# Altium PCB GRBL3-10086.PcbDoc
Units mm, origin at the board's own origin, x right, y up, seen from the top; angles counter-clockwise.
Board outline 168.5 x 112.7 mm, 2 copper layers (Top Layer, Bottom Layer); 144 components, 98 nets, 484 pads, 345 vias.
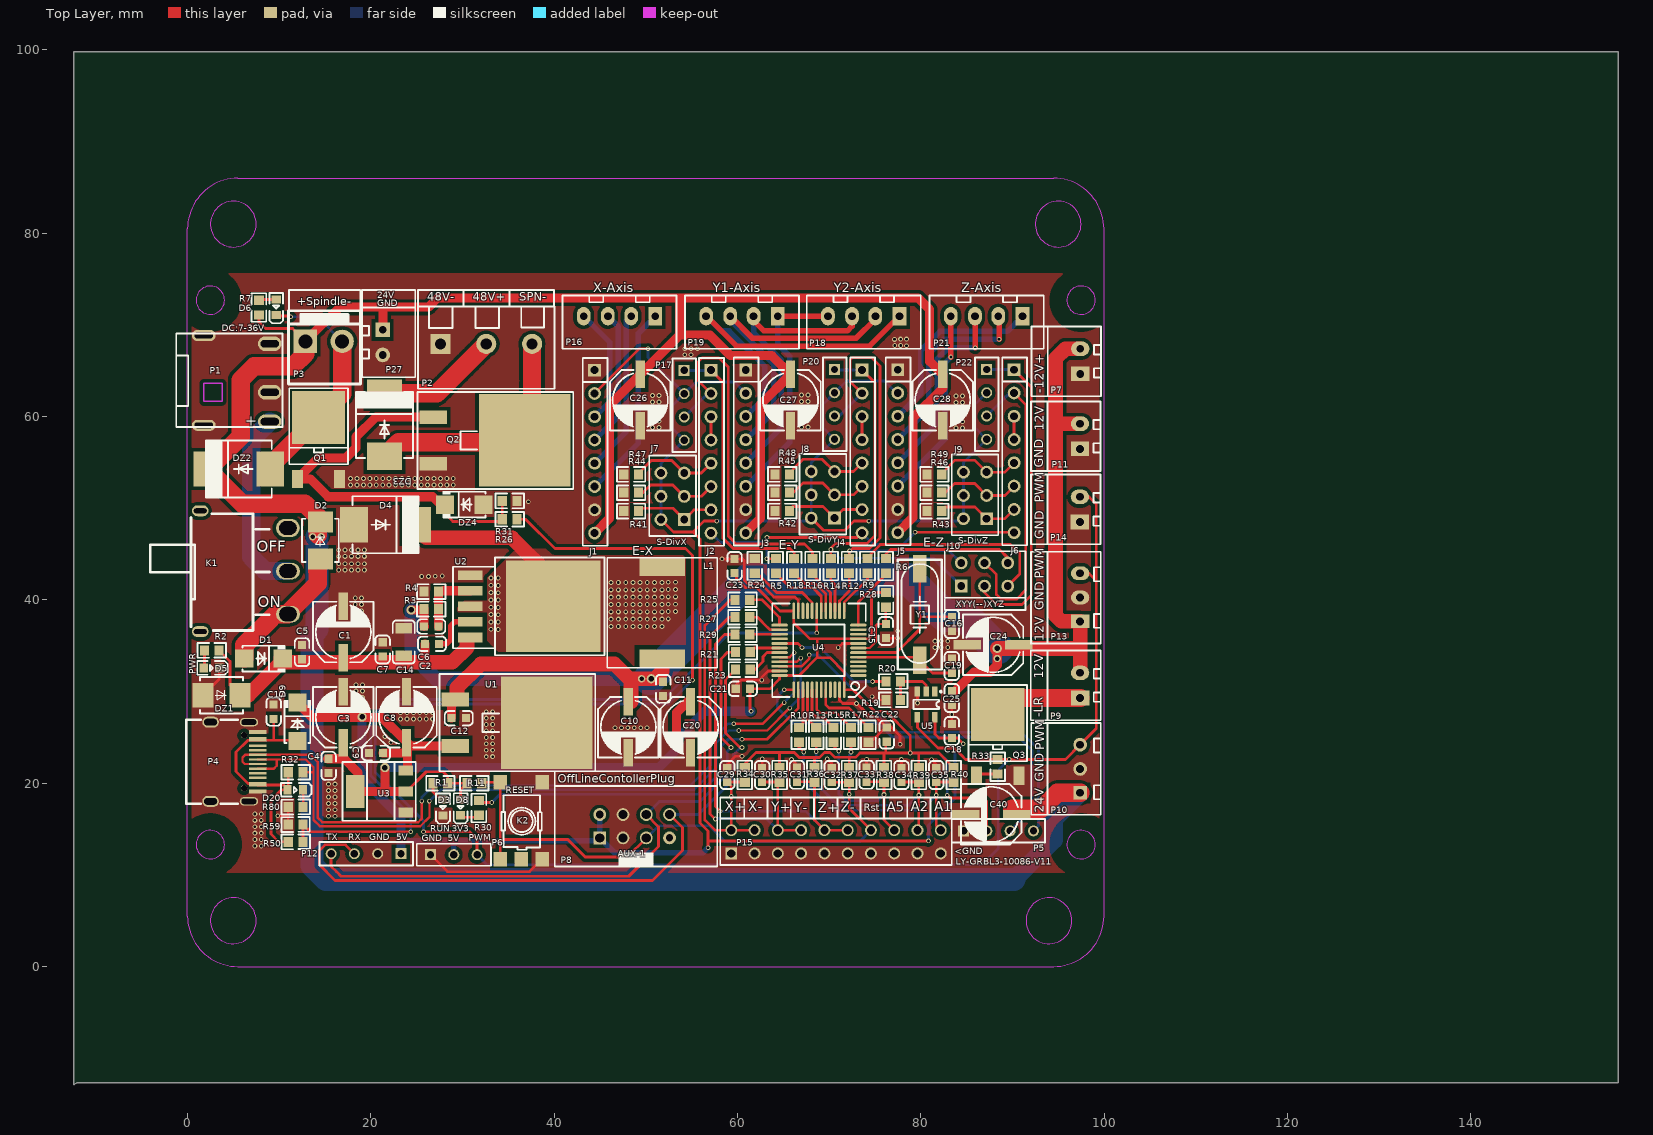
[diagram p0: Top Layer view]
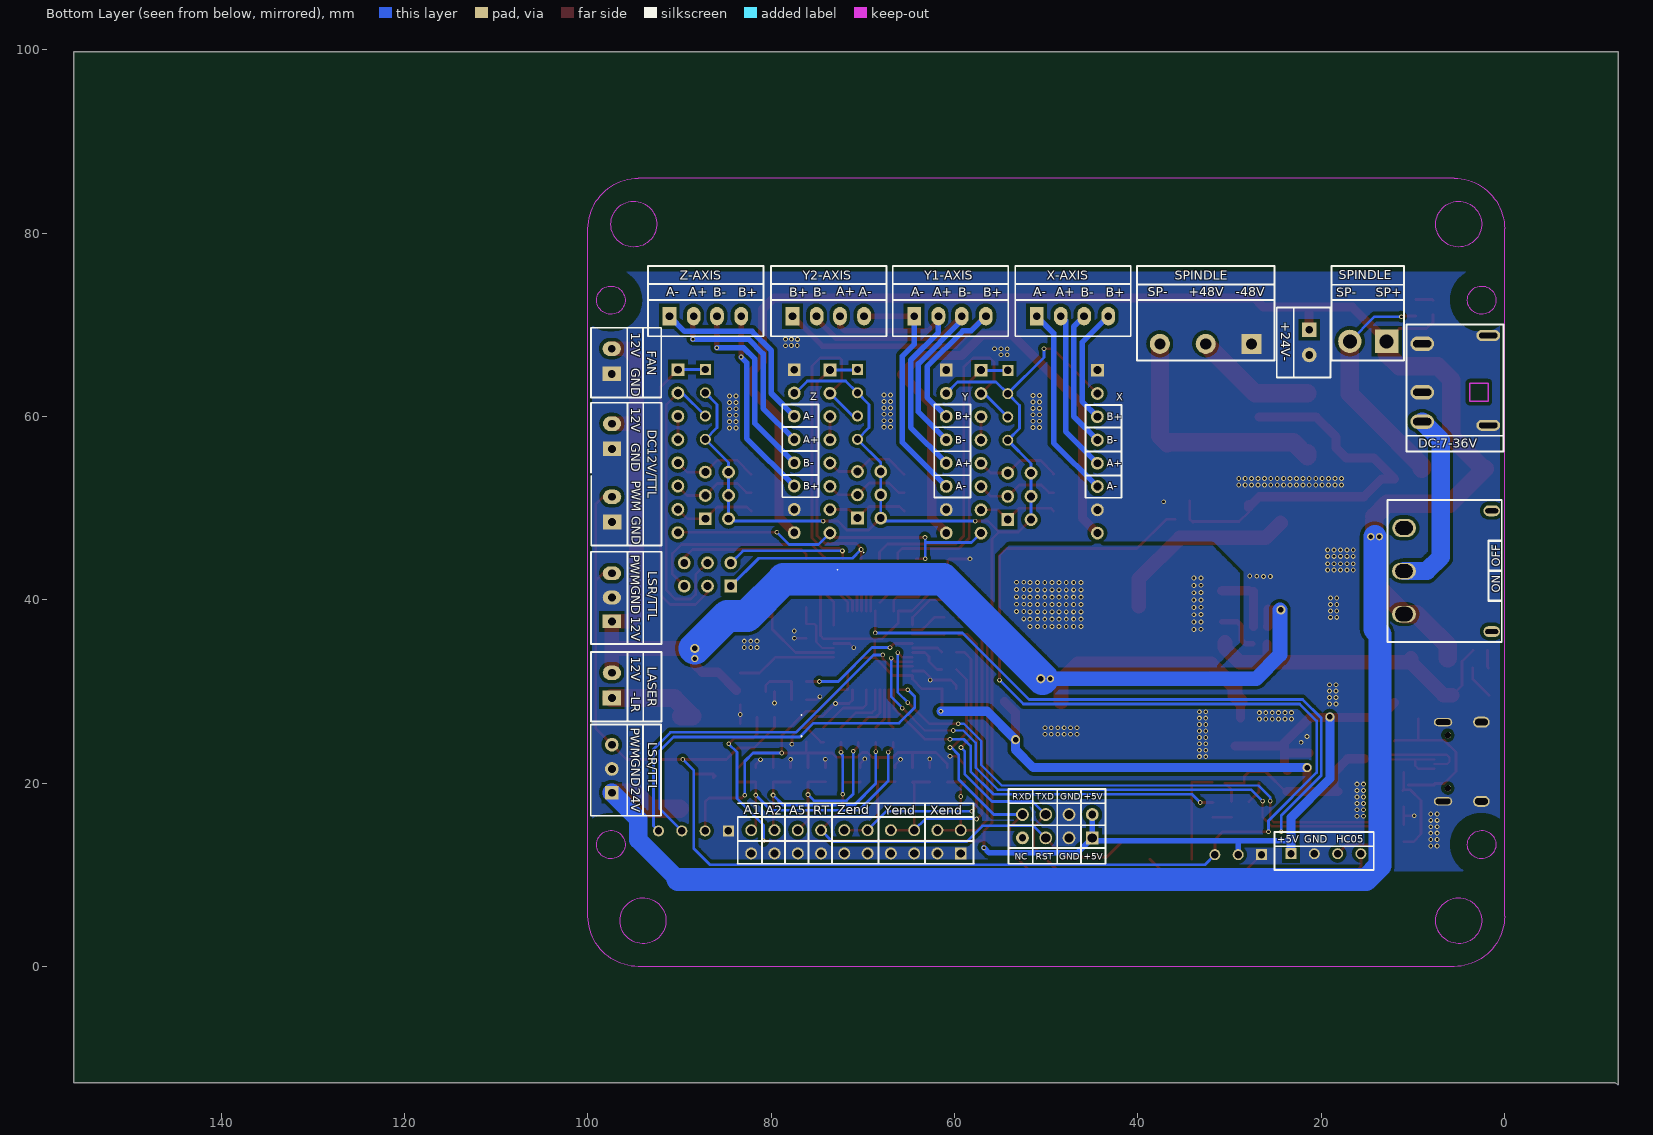
[diagram p1: Bottom Layer view, seen from below]

## Layer stack, top to bottom
Top Solder: solder mask 0.0102, Solder Resist, Dk 3.5
Top Layer: signal copper 0.0356
Dielectric1: dielectric 0.32, FR-4, Dk 4.8
Bottom Layer: signal copper 0.0356
Bottom Solder: solder mask 0.0102, Solder Resist, Dk 3.5

## Board outline
-12.4,-12.9 -12.4,99.8 156.1,99.8 156.1,-12.7 -12.1,-12.7

## Design rules (kind name [scope] priority, off if disabled: settings)
Clearance [All] p1: gap=0.178
ComponentClearance [All] p1 off: gap=0.254 collisioncheckmode=3 verticalgap=0.254 showdistances=FALSE
MinimumSolderMaskSliver [All] p1 off: minsoldermaskwidth=0.254
PolygonConnect [All] p1: connectstyle=Direct reliefconductorwidth=0.3 reliefentries=4 polygonreliefangle="90 Angle" airgapwidth=0.254
RoutingVias [All] p1: holewidth=0.6 width=0.8 viastyle="Through Hole" minholewidth=0.3 minwidth=0.3 maxholewidth=2 maxwidth=1.27
SilkToSilkClearance [All] p1 off: silktosilkclearance=0.254
SilkToSolderMaskClearance SilkscreenOverComponentPads [IsPad] p1 off: minsilkscreentomaskgap=0.254 clearancetoexposedcopper=TRUE
SolderMaskExpansion [All] p1: expansion=0.102
Width [All] p1: maxlimit=5 minlimit=0.1 preferedwidth=0.254
26 further rules are at their usual default settings.

## Components (designator, comment, footprint, x,y, rotation, side; value= is the part's Value field where it differs from the comment)
C1 "100uF/35V" 电解电容贴片6x6 17,36.5 r90 top
C2 "105" 0603C 26.675,35.2 r180 top
C3 "100uF/35V" 电解电容贴片6x6 17,27.2 r90 top
C4 "104" 0603C 15.4,21.9 r90 top
C5 "105" 0603C 12.5,34.3 r270 top
C6 "33nF" 0603C 26.6,37.1 r180 top
C7 "104" 0603C 21.3,34.6 r270 top
C8 "100uF/35V" 电解电容贴片6x6 23.9,27.2 r90 top
C9 "105" 0603C 20.575,23.3 r0 top
C10 "100uF/35V" 电解电容贴片6x6 48.1,26.1 r270 top
C11 "105" 0603C 51.9,30.3 r90 top
C12 "104" 0603C 29.6,27.1 r180 top
C14 "106" 1206C 23.6,35.4 r270 top
C15 "104" 0603C 76.2,36.6 r90 top
C16 "22pF" 0603C 83.4,37.375 r270 top
C17 "104" 0603C 9.4,27.8 r270 top
C18 "104" 0603C 83.4,25.7 r270 top
C19 "22pF" 0603C 83.4,32.8 r90 top
C20 "100uF/35V" 电解电容贴片6x6 54.9,26.1 r270 top
C21 "104" 0603C 60.6,30.3 r0 top
C22 "104" 0603C 76.3,25.3 r270 top
C23 "104" 0603C 59.695,43.7 r270 top
C24 "100uF/35V" 电解电容贴片6x6 87.9,35.1 r180 top
C25 "104" 0603C 83.4,29.3 r90 top
C26 "47uF/50V" 电解电容贴片6x6 49.4,61.8 r270 top
C27 "47uF/50V" 电解电容贴片6x6 65.8,61.8 r270 top
C28 "47uF/50V" 电解电容贴片6x6 82.4,61.8 r270 top
C29 "104" 0603C 58.9,20.9 r270 top
C30 "104" 0603C 62.7,20.9 r270 top
C31 "104" 0603C 66.5,20.925 r270 top
C32 "104" 0603C 70.3,20.9 r270 top
C33 "104" 0603C 74.1,20.925 r270 top
C34 "104" 0603C 77.9,20.9 r270 top
C35 "104" 0603C 81.7,20.9 r270 top
C40 "100uF/35V" 电解电容贴片6x6 87.7,16.6 r180 top
D1 "SS56" SMA 8.3,33.6 r180 top
D2 "SS510" SMB 14.5,46.5 r270 top
D3 "红光" 0603LED 27.9,17.3 r270 top
D4 "SS56" SMC 21.6,48.2 r180 top
D5 "红光" 0603LED 2.65,32.6 r0 top
D6 "绿光" 0603LED 9.7,71.9 r270 top
D8 "绿光" 0603LED 29.817,17.316 r270 top
D9 "SS56" SMA 12,26.7 r270 top
D20 "红光" 0603LED 11.8,19.3 r0 top
DZ1 "SMBJ36A" SMB 3.7,29.6 r180 top
DZ2 "快恢复二极管RS5M" SMC 5.6,54.3 r0 top
DZ3 "快恢复二极管RS5M" SMC 21.5,59.1 r270 top
DZ4 "稳压二极管SMAZ10V" SMA 30.2,50.4 r0 top
J1 "8P" HDR1X8 44.423,54.905 r270 top
J2 "8P" HDR1X8 57.123,54.905 r270 top
J3 "8P" HDR1X8 60.907,54.931 r270 top
J4 "8P" HDR1X8 73.607,54.931 r270 top
J5 "8P" HDR1X8 77.494,54.956 r270 top
J6 "8P" HDR1X8 90.194,54.956 r270 top
J7 "DIV-X" HDR2X3 54.2,48.76 r90 top
J8 "DIV-Y" HDR2X3 70.6,48.92 r90 top
J9 "DIV-Z" HDR2X3 87.2,48.86 r90 top
J10 "DIV-Y" HDR2X3 84.42,41.5 r0 top
K1 "5P" 拨动开关SS12D11 3.541,43.161 r0 top
K2 "开关" 按键6x6贴片5脚 34.139,11.7 r90 top
L1 "47uH/5A" 电感贴片12x12 51.8,38.6 r270 top
P1 "DC44A" DC0044A -1.224,62.65 r0 top
P2 "3P" 直插座3P-KF300 27.599,67.935 r0 top
P3 "2P" VH3.96-2P直插座 15.014,69.054 r180 top
P4 "USB座TYPE-C-16P" USB-TYPE-C-16P 4.938,22.342 r270 top
P5 "" SIP4 84.68,14.8 r0 top
P6 "3P" SIP3 26.52,12.2 r0 top
P7 "2P红色" HDR1X2_CON#1 97.407,66.029 r90 top
P8 "8P" IDC8 48.792,15.307 r0 top
P9 "2P红色" HDR1X2_CON#1 97.394,30.672 r90 top
P10 "3P" HDR1X3_CON#1 97.4,21.56 r90 top
P11 "2P红色" HDR1X2_CON#1 97.382,57.85 r90 top
P12 "" SIP4 23.29,12.305 r180 top
P13 "3P" HDR1X3_CON#2 97.394,40.259 r90 top
P14 "2P白色" HDR1X2_CON#1 97.369,49.874 r90 top
P15 "Header 10X2H" HDR2X10 59.333,12.335 r0 top
P16 "4P" HDR1X4_CON 50.949,70.958 r180 top
P17 "" SIP4 54.2,65.04 r270 top
P18 "4P" HDR1X4_CON 77.593,70.958 r180 top
P19 "4P" HDR1X4_CON 64.309,70.958 r180 top
P20 "" SIP4 70.6,65.14 r270 top
P21 "4P" HDR1X4_CON 91.005,70.958 r180 top
P22 "4P" SIP4 87.2,65.14 r270 top
P27 "2P红色" HDR1X2_CON#2 21.3,68.1 r270 top
Q1 "40N06" TO-252 14.3,55.8 r0 top
Q2 "F540NS" TO-263-2 26.8,57.4 r180 top
Q3 "UTT30N06" TO-252 88.4,23.4 r0 top
R1 "1K" 0603R 27.6,20 r180 top
R2 "10K" 0603R 2.65,34.5 r180 top
R3 "16K" 0603R 26.6,39 r180 top
R4 "1.8K" 0603R 26.6,40.9 r0 top
R5 "100" 0603R 64.195,43.7 r90 top
R6 "100" 0603R 76.195,43.7 r270 top
R7 "10K" 0603R 7.8,71.9 r90 top
R9 "100" 0603R 74.195,43.7 r270 top
R10 "100" 0603R 66.7,25.275 r270 top
R11 "10K" 0603R 31.3,20 r180 top
R12 "100" 0603R 72.195,43.7 r270 top
R13 "100" 0603R 68.6,25.275 r270 top
R14 "100" 0603R 70.195,43.7 r270 top
R15 "100" 0603R 70.5,25.275 r270 top
R16 "100" 0603R 68.195,43.7 r270 top
R17 "100" 0603R 72.4,25.275 r270 top
R18 "100" 0603R 66.195,43.7 r270 top
R19 "10K" 0603R 77,29.1 r180 top
R20 "100" 0603R 77,31.1 r180 top
R21 "100" 0603R 60.6,34.3 r0 top
R22 "10k" 0603R 74.3,25.275 r90 top
R23 "100" 0603R 60.6,32.4 r0 top
R24 "10k" 0603R 61.895,43.7 r270 top
R25 "100" 0603R 60.557,40.013 r180 top
R26 "1K" 0603R 35.15,48.8 r180 top
R27 "100" 0603R 60.557,38.113 r180 top
R28 "10k" 0603R 76.2,40 r270 top
R29 "100" 0603R 60.557,36.213 r180 top
R30 "1K" 0603R 31.8,17.3 r270 top
R31 "10K" 0603R 35.15,50.8 r0 top
R32 "10K" 0603R 11.8,21.2 r0 top
R33 "100" 0603R 88.4,21.8 r270 top
R34 "10K" 0603R 60.8,20.9 r90 top
R35 "10K" 0603R 64.6,20.9 r90 top
R36 "10K" 0603R 68.4,20.9 r90 top
R37 "10K" 0603R 72.2,20.9 r90 top
R38 "10K" 0603R 76,20.9 r90 top
R39 "10K" 0603R 79.8,20.9 r90 top
R40 "10K" 0603R 83.6,20.9 r90 top
R41 "10K" 0603R 48.4,49.7 r180 top
R42 "10K" 0603R 64.9,49.7 r180 top
R43 "10K" 0603R 81.5,49.7 r180 top
R44 "10K" 0603R 48.4,51.7 r180 top
R45 "10K" 0603R 64.9,51.7 r180 top
R46 "10K" 0603R 81.5,51.7 r180 top
R47 "10K" 0603R 48.4,53.7 r180 top
R48 "10K" 0603R 64.9,53.7 r180 top
R49 "10K" 0603R 81.5,53.7 r180 top
R50 "1K" 0603R 11.8,13.6 r0 top
R59 "1.8K" 0603R 11.8,15.5 r180 top
R80 "1K" 0603R 11.8,17.4 r0 top
U1 "CJ7805" TO-263-2 29.2,26.6 r180 top
U2 "XL4015" TO-263 35.374,39.3 r270 top
U3 "1117-3.3" SOT-223 21.1,19.1 r90 top
U4 "STM32F103C8T6/CBT6" LQFP48 68.9,34.5 r180 top
U5 "74LVC1G17" SOT-23-5 80.6,28.6 r270 top
Y1 "8M" 晶振贴片 79.9,38.4 r90 top

## Footprints (in the part's own frame and the unit in brackets; to place one, negate y for a bottom-side part, rotate by r counter-clockwise, add the part's x,y. Pads: shape width x height; smd on the part's side, far side on the other; paste and mask are expansions set on the pad)
0603C [mil]
  rect 35x35 smd: 1(-30.5,0) 2(30.5,0)
  silkscreen extent -60,-31 60,31
0603LED [mm]
  rect 0.9x1 smd: 1(-0.884,-0.017) 2(0.816,-0.017)
  silkscreen extent -1.58,-0.77 1.72,0.73
0603R [mm]
  rect 1x1.1 smd: 1(-0.8,0) 2(0.8,0)
  silkscreen extent -1.55,-0.8 1.55,0.81
1206C [mm]
  rect 1.13x1.8 smd: 1(-1.49,0) 2(1.49,0)
  silkscreen extent -2.36,-1.2 2.35,1.2, body extent -1.6,-0.81 1.6,0.79, height 1
DC0044A [mm]
  oval 2.6x1.6 hole 0.8 slot 2 at 0 deg: 1(10.2,-3.2) 2(10.2,0) 3(10.2,5.3)
  oval 2.6x1.2 hole 0.6 slot 2 at 0 deg: 4(3,6.2) 5(3,-3.6)
  Keep-Out Layer lines w0.16: 3,-1 5,-1 5,1 3,1 3,0 3,-1
  silkscreen extent 0,-3.8 11.6,6.4
HDR1X2_CON#1 [mm] "Connector; Header; 3 Position"
  rect 1.6x2 hole 0.85: 1(-1.37,0)
  oval 1.6x2 hole 0.85: 2(1.37,0)
  silkscreen extent -3.8,-2.25 3.8,3.55
HDR1X2_CON#2 [mm] "Connector; Header; 3 Position"
  rect 1.6x1.6 hole 0.86: 1(-1.37,0)
  round 1.6 hole 0.86: 2(1.37,0)
  silkscreen extent -3.8,-2.25 3.8,3.55
HDR1X3_CON#1 [mm] "Connector; Header; 3 Position"
  rect 1.5x1.5 hole 0.86: 1(-2.6,0)
  round 1.5 hole 0.86: 2(0,0) 3(2.64,0)
  silkscreen extent -5,-2.25 5,3.55
HDR1X3_CON#2 [mm] "Connector; Header; 3 Position"
  rect 1.5x2 hole 0.85: 1(-2.6,0)
  oval 1.5x2 hole 0.85: 2(0,0) 3(2.64,0)
  silkscreen extent -5,-2.25 5,3.55
HDR1X4_CON [mm] "Connector; Header; 4 Position"
  rect 1.5x2 hole 0.85: 1(-0.1,0)
  oval 1.5x2 hole 0.85: 2(2.54,0) 3(5.08,0) 4(7.72,0)
  silkscreen extent -2.41,-2.25 10.03,3.55
HDR1X8 [mm] "Connector; Header; 3 Position"
  rect 1.4x1.4 hole 0.86: 1(-10.16,0)
  round 1.4 hole 0.86: 2(-7.62,0) 3(-5.08,0) 4(-2.54,0) 5(0,0) 6(2.54,0) 7(5.08,0) 8(7.62,0)
  silkscreen extent -11.5,-1.3 9,1.4
HDR2X3 [mm] "Connector; Header; 13x2 Position"
  rect 1.4x1.4 hole 0.86: 1(0,0)
  round 1.4 hole 0.86: 2(2.54,0) 3(5.08,0) 4(5.08,2.54) 5(2.54,2.54) 6(0,2.54)
  silkscreen extent -1.8,-1.27 7,3.81
HDR2X10 [mm] "Connector; Header; 13x2 Position"
  rect 1.3x1.3 hole 0.9: 1(0,0)
  round 1.3 hole 0.9: 2(0,2.54) 3(2.54,0) 4(2.54,2.54) 5(5.08,0) 6(5.08,2.54) 7(7.62,0) 8(7.62,2.54) 9(10.16,0) 10(10.16,2.54) 11(12.7,0) 12(12.7,2.54) 13(15.24,0) 14(15.24,2.54) 15(17.78,0) 16(17.78,2.54) 17(20.32,0) 18(20.32,2.54) 19(22.86,0) 20(22.86,2.54)
  silkscreen extent -1.2,-1.27 24.06,3.81
IDC8 [mm]
  rect 1.4x1.4 hole 1: 1(-3.81,-1.27)
  round 1.4 hole 0.85: 2(-3.81,1.27)
  round 1.4 hole 1: 3(-1.27,-1.27) 4(-1.27,1.27) 5(1.27,-1.27) 6(1.27,1.27) 8(3.81,1.27)
  round 1.4 hole 0.8: 7(3.81,-1.27)
  silkscreen extent -8.72,-4.4 9.01,4.4
LQFP48 [mm] "48-Pin Thin Quad Flat Pack 0.5 mm Pitch, IPC Low Density"
  oval 1.8x0.3 smd: 1(-4.3,2.75) 2(-4.3,2.25) 3(-4.3,1.75) 4(-4.3,1.25) 5(-4.3,0.75) 6(-4.3,0.25) 7(-4.3,-0.25) 8(-4.3,-0.75) 9(-4.3,-1.25) 10(-4.3,-1.75) 11(-4.3,-2.25) 12(-4.3,-2.75) 25(4.3,-2.75) 26(4.3,-2.25) 27(4.3,-1.75) 28(4.3,-1.25) 29(4.3,-0.75) 30(4.3,-0.25) 31(4.3,0.25) 32(4.3,0.75) 33(4.3,1.25) 34(4.3,1.75) 35(4.3,2.25) 36(4.3,2.75)
  oval 0.3x1.8 smd: 13(-2.75,-4.3) 14(-2.25,-4.3) 15(-1.75,-4.3) 16(-1.25,-4.3) 17(-0.75,-4.3) 18(-0.25,-4.3) 19(0.25,-4.3) 20(0.75,-4.3) 21(1.25,-4.3) 22(1.75,-4.3) 23(2.25,-4.3) 24(2.75,-4.3) 37(2.75,4.3) 38(2.25,4.3) 39(1.75,4.3) 40(1.25,4.3) 41(0.75,4.3) 42(0.25,4.3) 43(-0.25,4.3) 44(-0.75,4.3) 45(-1.25,4.3) 46(-1.75,4.3) 47(-2.25,4.3) 48(-2.75,4.3)
  silkscreen extent -5.1,-5.1 5.1,5.1
SIP3 [mm] "Connector; Header; 4 Position"
  rect 1.2x1.2 hole 0.8: 1(0,0)
  round 1.2 hole 0.8: 2(2.54,0) 3(5.08,0)
  silkscreen extent -1.5,-1.2 6.6,1.2
SIP4 [mm] "Connector; Header; 4 Position"
  rect 1.2x1.2 hole 0.8: 1(0,0)
  round 1.2 hole 0.8: 2(2.54,0) 3(5.08,0) 4(7.62,0)
  silkscreen extent -1.3,-1.27 8.9,1.3
SMA [mm]
  rect 2x2 smd: 1(2.1,0) 2(-2.1,0)
  silkscreen extent -2.4,-1.4 2.3,1.5
SMB [mm]
  rect 2.29x2.72 smd: 1(2.025,0) 2(-2.025,0)
  silkscreen extent -2.35,-2 2.35,2
SMC [mm]
  rect 3.03x3.82 smd: 1(3.435,0) 2(-3.435,0)
  silkscreen extent -3.66,-3.11 3.6,3.11
SOT-23-5 [mm]
  rect 1.1x0.6 smd: 1(-1.4,0.95) 2(-1.4,0) 3(-1.4,-0.95) 4(1.4,-0.95) 5(1.4,0.95)
  silkscreen extent -1.5,-1.4 0.5,1.7
SOT-223 [mm] "SOT-223/SC-73; 4 Leads; Body 6.7 x 7.3 mm, inc. leads (LxW max)"
  rect 1.1x1.6 smd: 1(-2.3,-2.7) 2(0,-2.7) 3(2.3,-2.7)
  rect 3.6x2 smd: 4(0,2.8)
  silkscreen extent -3.2,-3.8 3.2,4.2
TO-252 [mm]
  rect 1.2x2 smd: 1(-2.3,-2.6) 3(2.3,-2.6)
  rect 5.8x5.8 smd: 2(0,4.1)
  silkscreen extent -3.2,-1 3.2,7.3
TO-263 [mm]
  rect 1.05x2.7 smd: 1(-3.4,-4.525) 2(-1.7,-4.525) 3(0,-4.525) 4(1.7,-4.525) 5(3.4,-4.525)
  rect 10x10.3 smd: 3(0,4.526)
  silkscreen extent -5.33,-6.4 5.33,10.11
TO-263-2 [mm]
  rect 3x1.5 smd: 1(0,-2.54) 3(0,2.54)
  rect 10x10.1 smd: 2(-10,0)
  silkscreen extent -15.3,-5.3 1.7,5.3
USB-TYPE-C-16P [mm]
  oval 0.9x2 hole 0.6 slot 1.6 at 90 deg: 1(-4.32,1.765) 2(4.32,1.765)
  oval 1.2x1.8 hole 0.7 slot 1.4 at 90 deg: 3(-4.32,-2.415) 4(4.32,-2.415)
  rect 0.26x1.9 smd: A1(-3.35,2.715) A4(-2.55,2.715) A5(-1.25,2.715) A6(-0.25,2.715) A7(0.25,2.715) A8(1.25,2.715) A9(2.55,2.715) A12(3.35,2.715) B1(3.15,2.715) B4(2.35,2.715) B5(1.75,2.715) B6(0.75,2.715) B7(-0.75,2.715) B8(-1.75,2.715) B9(-2.35,2.715) B12(-3.15,2.715)
  round 0.7 hole 0.7 unplated: ""(-2.89,1.235) ""(2.89,1.235)
  silkscreen extent -4.57,-5.08 4.57,0.57
VH3.96-2P直插座 [mil]
  rect 100x100 hole 60: 1(84.67,33.05)
  round 100 hole 60: 2(-73.33,33.05)
  silkscreen extent -152,-98 158,217
拨动开关SS12D11 [mm]
  oval 2.6x1.8 hole 1.6 slot 1.9 at 0 deg: 1(7.43,-4.715)
  oval 2.6x1.8 hole 1.5 slot 1.9 at 0 deg: 2(7.43,-0.015)
  oval 2.6x2 hole 1.5 slot 1.9 at 0 deg: 3(7.417,4.683)
  oval 1.8x1.2 hole 0.5 slot 1.4 at 0 deg: 4(-2.146,6.564) 5(-2.146,-6.619)
  silkscreen extent -7.6,-6.49 5.42,6.23
按键6x6贴片5脚 [mil]
  rect 64x58 smd: 0(0,-89) 1(0,0) 1(331,0) 2(0,-179) 2(331,-179)
  silkscreen extent 41,-178 275,-5
晶振贴片 [mm]
  rect 3x1.5 smd: 1(-5,0) 2(5,0)
  silkscreen extent -6,-2.4 6,2.4
电感贴片12x12 [mm]
  rect 2x5 smd: 1(-5,0) 2(5,0)
  silkscreen extent -6,-6 6,6
电解电容贴片6x6 [mm]
  rect 3x1 smd: 1(-2.8,0) 2(2.8,0)
  silkscreen extent -3.3,-3.3 3.3,3.3
直插座3P-KF300 [mil]
  rect 86x86 hole 48: 1(0,0)
  round 86 hole 48: 2(196.85,0) 3(393.7,0)
  silkscreen extent -97,-193 491,160

## Part data
C1 C3 C8 C10 C20 C24 C26 C27 C28 C40: library part ELECTRO1
C2 C5 C6 C7 C11 C14 C21 C22 C23: library part CAP
C4 C9 C12 C15 C16 C17 C18 C19 C25 C29 C30 C31 C32 C33 C34 C35: library part "Cap Semi", "Capacitor (Semiconductor SIM Model)"
D1 D2 D4 D9: library part 1N4148
D3 D5 D6 D8 D20: library part LED
DZ1 DZ2 DZ3 DZ4: library part 稳压二极管
J7 J8 J9 J10: library part DIP6
L1: library part Inductor, "Inductor"
P1: library part "Header 5", "Header, 5-Pin"
P5 P12 P17 P20: library part 4P
P7 P9 P11 P14 P27: library part 2P
P15: "Header, 10-Pin, Dual row, Right Angle"
Q1 Q2 Q3: library part MOSFET-N, "N-Channel MOSFET"
R1 R2 R3 R4 R5 R6 R7 R9 R10 R11 R12 R13 R14 R15 R16 R17 R18 R19 R20 R21 R22 R23 R24 R25 R26 R27 R28 R29 R30 R31 R32 R33 R34 R35 R36 R37 R38 R39 R40 R41 R42 R43 R44 R45 R46 R47 R48 R49 R50 R59 R80: library part RES, "Resistor"
U1: library part 7805
U2: library part XL4005
U3: library part LM1117
U4: library part STM32F103C6T6, "STM32 ARM-based 32-bit MCU with 32 Kbytes Flash, 48-pin LQFP, Industrial Temperature"
Y1: library part XTAL, "Crystal Oscillator"

## Free pads (board coordinates)
  round 0.8 hole 0.5: 0(13.65,46.9) 0(49.55,31.4) 1(14.6,46.9) 1(88.35,33.6)
  round 1 hole 0.6: 0(88.35,34.7) 1(21.55,21.7) 2(53.35,24.75) 3(19.05,27.225) 6(24.4,38.9) 7(50.6,31.4)

## Via types
v1: diameter 0.53, hole 0.3, Top Layer to Bottom Layer, 283 vias
v2: diameter 0.5, hole 0.3, Top Layer to Bottom Layer, 62 vias

## Nets (pads, with @x,y where several pads share a name; then routed paths per layer and width w, separated by ;. In a path a pad name is that pad's centre, name@x,y a point inside that pad or via, vN(x,y) a via of type N, cw(c..) or ccw(c..) an arc to the next point about the centre after c; other vN are vias at no path point)
3V3: C3.1 C4.2 C20.1 C21.2 C22.2 C23.2 D8.1 P5.2 pad.1@21.55,21.7 pad.2 R1.1 R11.2 R28.1 R34.2 R35.2 R36.2 R37.2 R38.2 R39.2 R40.2 U3.2 U3.4 U4.9 U4.24 U4.36 U4.48 | length 177.1
  Top Layer w0.3: U3.2@23.7,19.1 23.9,19.1 26.05,21.25 27.9,21.25 28.4,20.75 R1.1 R11.2 29.8,19.3 D8.1@29.8,18 ; C23.2@59.895,42.925 59.895,42.329 60.902,41.322 62.128,41.322 64.65,38.8 U4.24 66.15,37.5 67.9,35.75 U4.9 74.295,35.75 74.645,36.1 74.645,40.445 75,40.8 R28.1 ; R34.2 60.8,22.1 62.05,23.35 64.6,23.35 ; v1(61.5,27.85) 61.375,27.975 C21.2 63.55,30.3 64.6,31.35 U4.36 66.75,31.75 68.7,33.7 ; R35.2 64.6,23.35 ; R36.2 68.4,22.7 ; 68.7,35.7 68.7,33.7 ; R37.2 72.2,22.822 ; R38.2 76,23.3 ; C22.2@76.2,24.5 76.2,23.3 ; R39.2 79.8,23.3 ; v2(82.9,18.7) 83.2,18.4 86.8,18.4 87.22,17.98 P5.2 ; R40.2 82,23.3 79.8,23.3 ; 64.6,23.35 66.2,23.35 66.75,22.8 68.95,22.8 69.5,23.35 70.1,23.35 70.628,22.822 72.2,22.822 ; 68.7,33.7 70.1,33.7 71.65,32.15 U4.48 72.6,30.2 74.95,27.85 76.2,27.85 78.85,25.2 v2(78.85,23.3) ; 72.2,22.822 72.878,22.822 73.356,23.3 76,23.3 ; 76,23.3 76.2,23.3 ; 76.2,23.3 v2(78.85,23.3) ; v2(78.85,23.3) 79.8,23.3
  Top Layer w1: C4.2@15.3,22.675 C4.2 17.075,22.675 ; U3.4@18.2,19.1 U3.2@23.7,19.1 ; U3.4@18.6,19.1 18.6,21.149 17.1,22.649 ; 21.55,19.4 pad.1@21.55,21.7 ; pad.2 53.35,27.7 C20.1@54.55,28.9 ; 17.075,22.675 17.1,22.649 ; 17.075,22.675 17.1,22.7 17.1,22.649
  Bottom Layer w0.3: v2(78.85,23.3) 82,23.3 82.9,22.4 v2(82.9,18.7)
  Bottom Layer w1: pad.1@21.55,21.7 51.4,21.7 53.35,23.65 pad.2 56.45,27.85 v1(61.5,27.85)
12V: C6.2 C10.1 C11.2 C12.2 C24.1 C25.2 L1.2 P7.2 P9.2 P11.2 P13.1 pad.0@49.55,31.4 pad.0@88.35,34.7 pad.1@88.35,33.6 pad.6 pad.7 R3.2 U1.1 | length 173.2
  Top Layer w1: pad.6 25.7,38.9 R3.2 25.8,37.125 C6.2 ; C12.2 U1.1@28.825,28.965 ; C25.2@83.8,30.1 85.8,32.1 87.55,32.1 88.35,32.9 pad.0@88.35,34.7
  Top Layer w1.6: U1.1@28.825,28.965 29.4,29.54 29.4,30.4 32,33 46.6,33 48.2,31.4 ; C10.1@48.4,28.9 48.4,31.2 48.2,31.4 ; L1.2 51.8,32.2 51,31.4 pad.7 48.2,31.4 ; pad.0@88.35,34.7 97.344,34.7 97.394,34.75 ; P11.2 94.72,59.22 94.7,59.2 ; P9.2 97.394,34.75 ; P7.2 95.799,67.399 94.7,66.3 94.7,59.2 ; 94.7,59.2 94.7,38.3 95.341,37.659 P13.1 97.394,34.75
  Bottom Layer w1.6: pad.6@24.5,38.9 24.5,34 27.1,31.4 pad.7 50.4,31.4 51.4,31.4
  Bottom Layer w3.5: pad.7@50.4,31.4 61.25,42.25 78.65,42.25 82.65,38.25 84.8,38.25 pad.0@88.35,34.7
24V: C1.1 C2.2 C5.2 C7.2 C14.2 D1.2 DZ1.2 R2.1 U2.5 | length 36.2
  Top Layer w0.3: R2.1 4.65,33.3 4.65,30.675 DZ1.2
  Top Layer w1: 25.85,33.2 25.9,33.25 ; C2.2 25.9,33.25 ; 26.1,33.45 25.9,33.25
  Top Layer w1.6: DZ1.2 6.65,29.6 10.25,33.2 D1.2@10.6,33.2 ; D1.2@10.2,33.6 D1.2@10.6,33.2 ; 30.5,35.35 30.5,34.8 28.9,33.2 25.85,33.2 23.6,33.2 21.2,33.2 D1.2@10.6,33.2
A_LIMT: U4.28
BOOT0: R22.2 U4.44 | length 7.3
  Top Layer w0.3: U4.44 69.65,28.55 70,28.2 72.175,28.2 R22.2
BOOT1: R24.2 U4.20 | length 7.3
  Top Layer w0.3: R24.2@62.195,42.9 64.295,40.8 67.076,40.8 68.15,39.726
CPU_PWM: R19.1 R20.1 U5.2 | length 5.7
  Top Layer w0.3: R19.1 R20.1 80.2,31.1 80.6,30.7 U5.2
GND: C1.2 C3.2 C4.1 C5.1 C7.1 C8.2 C9.1 C10.2 C11.1 C12.1 C14.1 C15.1 C16.2 C17.1 C18.1 C19.2 C20.2 C21.1 C22.1 C23.1 C24.2 C25.1 C26.2 C27.2 C28.2 C29.1 C30.1 C31.1 C32.1 C33.1 C34.1 C35.1 C40.2 D3.2 D4.1 D5.2 DZ1.1 DZ4.1 J1.1 J1.7 J3.1 J3.7 J5.1 J5.7 K2.2 P1.2 P1.3 P1.4 P1.5 P2.1 P4.1 P4.2 P4.3 P4.4 P4.A1 P4.A12 P4.B1 P4.B12 P5.1 P6.1 P7.1 P8.3 P8.4 P10.2 P11.1 P12.2 P13.2 P14.1 P15.1 P15.3 P15.5 P15.7 P15.9 P15.11 P15.13 P15.15 P15.17 P15.19 P27.2 Q1.3 Q2.3 Q3.3 R4.1 R19.2 R22.1 R24.1 R31.2 R41.2 R42.2 R43.2 R44.2 R45.2 R46.2 R47.2 R48.2 R49.2 R59.2 R80.1 U1.2 U2.1 U3.1 U4.8 U4.23 U4.35 U4.47 U5.3 | length 69.3
  Top Layer w0.3: DZ1.1 3.466,31.391 D5.2 ; v2(9.85,16.45) 11,16.45 ; R59.2 11,16.45 ; R80.1 11,16.45 ; P6.1 28.37,10.35 37.336,10.35 K2.2@38.686,11.7 ; v2(58.325,44.475) C23.1 60.575,44.475 60.75,44.3 60.75,42.15 61.1,41.8 62.5,41.8 63.978,40.322 66.278,40.322 66.65,39.95 U4.23 ; C29.1 58.9,22.05 59.8,22.95 v2(60.5,22.95) ; C21.1 59.825,30.675 60.4,31.25 v2(62.65,31.25) 62.65,31.55 63.35,32.25 U4.35 ; C30.1 v2(62.7,22.65) ; v2(65.9,22.6) 66.5,22 C31.1 ; v2(69.8,22.65) 70.3,22.15 C32.1 ; v2(71,34.8) 71.45,35.25 U4.8 ; U4.47 71.15,29.05 71.504,28.696 v1(73.004,28.696) 73.85,27.85 ; 73.95,27.75 73.85,27.85 ; C33.1 v2(74.1,22.625) ; R22.1 74.575,24.475 76.175,26.075 C22.1@76.2,26.075 ; v2(74.7,29.45) 75.05,29.1 R19.2 ; C22.1@76.2,26.049 C22.1@76.2,26.075 ; C15.1 v2(77.475,35.825) ; v2(77.75,24.25) 77.75,25.15 76.825,26.075 C22.1 ; C34.1 v2(77.9,22.6) ; v2(79.65,28.75) U5.3 ; v2(81.18,22.574) 81.7,22.054 C35.1 ; C18.1 C25.1 ; 73.85,27.85 74.4,27.3 75.075,27.3 C22.1@76.2,26.175 ; C22.1@76.2,26.075 C22.1 ; C22.1@76.2,26.075 C22.1@76.2,26.175 ; C22.1@76.2,26.175 C22.1
  other v1: 7.35,13.15 8.05,13.15 7.35,13.85 8.05,13.85 7.35,14.55 8.05,14.55 7.35,15.25 8.05,15.25 7.35,15.95 8.05,15.95 15.4,16.4 16.1,16.4 7.35,16.65 8.05,16.65 15.4,17.1 16.1,17.1 15.4,17.8 16.1,17.8 15.4,18.5 16.1,18.5 15.4,19.2 16.1,19.2 15.4,19.9 16.1,19.9 32.6,22.9 33.3,22.9 32.6,23.6 33.3,23.6 32.6,24.3 33.3,24.3 32.6,25 33.3,25 46.65,25.35 47.35,25.35 48.05,25.35 48.75,25.35 49.45,25.35 50.15,25.35 32.6,25.7 33.3,25.7 46.65,26.05 47.35,26.05 48.05,26.05 48.75,26.05 49.45,26.05 50.15,26.05 32.6,26.4 33.3,26.4 23.25,27 23.95,27 24.65,27 25.35,27 26.05,27 26.75,27 32.6,27.1 33.3,27.1 23.25,27.7 23.95,27.7 24.65,27.7 25.35,27.7 26.05,27.7 26.75,27.7 32.6,27.8 33.3,27.8 18.4,28.65 19.1,28.65 18.4,29.35 19.1,29.35 18.4,30.05 19.1,30.05 18.4,30.75 19.1,30.75 81.55,34.8 82.25,34.8 82.95,34.8 81.55,35.5 82.25,35.5 82.95,35.5 77.5,36.6 18.3,38.1 19,38.1 18.3,38.8 19,38.8 18.3,39.5 19,39.5 18.3,40.2 19,40.2 25.55,42.55 26.3,42.55 27.036,42.582 27.8,42.6 16.5,43.25 17.2,43.25 17.9,43.25 18.6,43.25 19.3,43.25 16.5,43.95 17.2,43.95 17.9,43.95 18.6,43.95 19.3,43.95 16.5,44.75 17.2,44.75 17.9,44.75 18.6,44.75 19.3,44.75 16.5,45.45 17.2,45.45 17.9,45.45 18.6,45.45 19.3,45.45 17.8,52.55 18.5,52.55 19.2,52.55 19.9,52.55 20.6,52.55 21.3,52.55 22,52.55 22.7,52.55 23.4,52.55 24.1,52.55 24.8,52.55 25.5,52.55 26.2,52.55 26.9,52.55 27.6,52.55 28.3,52.55 29,52.55 17.8,53.25 18.5,53.25 19.2,53.25 19.9,53.25 20.6,53.25 21.3,53.25 22,53.25 22.7,53.25 23.4,53.25 24.1,53.25 24.8,53.25 25.5,53.25 26.2,53.25 26.9,53.25 27.6,53.25 28.3,53.25 29,53.25 83.85,58.75 84.55,58.75 50.75,58.8 51.45,58.8 67,58.85 67.7,58.85 83.85,59.45 84.55,59.45 50.75,59.5 51.45,59.5 67,59.55 67.7,59.55 83.85,60.15 84.55,60.15 50.75,60.2 51.45,60.2 67,60.25 67.7,60.25 83.85,60.85 84.55,60.85 50.75,60.9 51.45,60.9 67,60.95 67.7,60.95 83.85,61.55 84.55,61.55 50.75,61.6 51.45,61.6 67,61.65 67.7,61.65 83.85,62.25 84.55,62.25 50.75,62.3 51.45,62.3 67,62.35 67.7,62.35 54.25,66.75 54.95,66.75 54.25,67.4 54.95,67.4 55.65,67.4 78.45,67.732 77.164,67.75 77.814,67.75 77.15,68.431 77.814,68.45 78.464,68.45
  other v2: 22.2,24.45 21.55,25.1 83.4,27.5 37.2,50.7
HOLD: C35.2 P15.20 R10.2 R40.1 | length 28.3
  Top Layer w0.3: R10.2 66.7,23.95 v2(67.25,23.4) ; P15.20 81.7,15.367 v1(81.7,18.7) C35.2 83.575,20.125 R40.1
  Bottom Layer w0.3: v2(67.25,23.4) 67.25,20.25 67.625,19.875 70.45,17.05 80.05,17.05 v1(81.7,18.7)
MA_DIR: U4.11
MA_STEP: U4.10
MOTOR_EN: J2.8 J4.8 J6.8 R5.2 | length 37.9
  Top Layer w0.3: v2(63.2,44.5) R5.2 ; v2@63.45,46.8 73.097,46.8 J4.8 ; v2(79.385,47.375) 90.154,47.375 J6.8
  Bottom Layer w0.3: J2.8 58.158,46.25 63.2,46.25 ; v2(63.2,44.5) 63.2,46.25 ; v2@63.2,46.819 63.2,46.25 ; J4.8 74.868,46.05 78.059,46.05 v2(79.385,47.375)
  other v2: 63.231,46.819
MX_1A: J1.4 P16.3 | length 15
  Bottom Layer w0.6: J1.4 47,60.022 47,69.827 P16.3
MX_1B: J1.3 P16.4 | length 12.9
  Bottom Layer w0.6: P16.4 46.101,68.086 46.101,66.449 46.101,66 46.101,61.663 J1.3
MX_2A: J1.5 P16.2 | length 17.7
  Bottom Layer w0.6: J1.5 47.9,58.382 47.9,67.1 47.9,67.408 47.9,70.449 P16.2
MX_2B: J1.6 P16.1 | length 21.3
  Bottom Layer w0.6: J1.6 49.187,57.129 49.187,69.096 P16.1
MX_DIR: J2.1 P17.1 R18.1 | length 30.9
  Top Layer w0.3: J2.1 58.4,63.788 58.4,46.75 59.55,45.6 65.75,45.6 66.195,45.155 R18.1
  Bottom Layer w0.3: P17.1 57.098,65.04 J2.1
MX_DIV1: J2.5 J7.3 R47.1 | length 9.6
  Top Layer w0.3: R47.1 49.2,53.8 50.6,55.2 52.84,55.2 J7.3 56.058,53.84 J2.5
MX_DIV2: J2.6 J7.2 R44.1 | length 9.2
  Top Layer w0.3: R44.1 49.7,51.7 50.55,52.55 52.95,52.55 J7.2 56.058,51.3 J2.6
MX_DIV3: J2.7 J7.1 R41.1 | length 9
  Top Layer w0.3: R41.1 49.5,50 52.96,50 J7.1 55.265,49.825 J2.7
MX_STEP: J2.2 P17.3 R16.1 | length 41
  Top Layer w0.3: J2.2 55.7,63.948 55.7,65.955 56.15,66.405 57.995,66.405 59,65.4 59,46.957 59.857,46.1 67.3,46.1 68.195,45.205 R16.1
  Bottom Layer w0.3: P17.3 56.765,62.525 J2.2
MY_1A: J3.4 P18.2 P19.3 | length 34.7
  Top Layer w0.6: P19.3 61.637,68.55 72.95,68.55 75.053,70.653 P18.2
  Bottom Layer w0.6: P19.3 59.229,70.471 63.95,65.75 63.95,60.513 J3.4
MY_1B: J3.3 P18.1 P19.4 | length 38.8
  Top Layer w0.6: P19.4 56.642,70.958 59.9,67.7 74.436,67.7 P18.1
  Bottom Layer w0.6: P19.4 58.197,69.35 59.1,69.35 62.997,65.453 62.997,62.1 J3.3
MY_2A: J3.5 P18.3 P19.2 | length 31.9
  Top Layer w0.6: P19.2 61.769,70.481 62.9,69.35 72,69.35 72.513,69.864 P18.3
  Bottom Layer w0.6: J3.5 64.8,58.823 64.8,66.15 61.769,69.181 P19.2
MY_2B: J3.6 P18.4 P19.1 | length 26.6
  Top Layer w0.6: P19.1 P18.4
  Bottom Layer w0.6: J3.6 65.7,57.183 65.7,66.6 64.409,67.891 P19.1
MY_DIR: J4.1 J10.1 P20.1 R14.1 | length 44
  Top Layer w0.3: R14.1 v1(70.195,45.5) ; v1@70.195,45.645 70.7,46.15 74.15,46.15 75.007,47.007 75.007,63.691 J4.1
  Bottom Layer w0.3: v1@70.209,45.515 v1(70.195,45.5) 71.145,44.55 81.37,44.55 J10.1 ; P20.1 70.649,65.091 J4.1
MY_DIV1: J4.5 J8.3 R48.1 | length 9.7
  Top Layer w0.3: R48.1@65.5,53.7 67.15,55.35 69.25,55.35 J8.3 72.677,54 J4.5
MY_DIV2: J4.6 J8.2 R45.1 | length 9.5
  Top Layer w0.3: R45.1@65.5,51.7 66.1,51.7 67.15,52.75 69.31,52.75 J8.2 72.677,51.46 J4.6
MY_DIV3: J4.7 J8.1 R42.1 | length 9.2
  Top Layer w0.3: R42.1@65.5,49.7 66,50.2 69.32,50.2 J8.1 71.531,49.851 J4.7
MY_STEP: J4.2 J10.6 P20.3 R12.1 | length 48.1
  Top Layer w0.3: R12.1 72.195,45.245 72.55,45.6 74.407,45.6 75.55,46.743 75.55,65.5 74.619,66.431 72.581,66.431 72.307,66.157 72.307,63.851 J4.2
  Bottom Layer w0.3: P20.3 71.117,60.06 J4.2 ; v1(72.25,45.35) 83.11,45.35 J10.6
MZ_1A: J5.4 P21.2 | length 21.6
  Top Layer w0.6: P21.2 88.55,70.873 v2(88.55,68.45)
  Bottom Layer w0.6: J5.4 80.9,60.902 80.9,66.85 82.5,68.45 v2(88.55,68.45)
MZ_1B: J5.3 P21.1 | length 20.9
  Bottom Layer w0.6: J5.3 80.006,62.549 80.006,67.207 82.1,69.3 89.447,69.3 P21.1
MZ_2A: J5.5 P21.3 | length 21.2
  Top Layer w0.6: P21.3 85.95,70.933 v2(85.95,67.508)
  Bottom Layer w0.6: J5.5 81.8,59.262 81.8,66.3 83.008,67.508 v2(85.95,67.508)
MZ_2B: J5.6 P21.4 | length 21
  Top Layer w0.6: P21.4 83.3,70.943 v2(83.3,66.5)
  Bottom Layer w0.6: J5.6 82.7,57.622 82.7,65.9 v2(83.3,66.5)
MZ_DIR: J10.3 R9.1 | length 21.8
  Top Layer w0.3: R9.1 74.195,44.645 75.6,46.05 89.8,46.05 90.8,45.05 90.8,44.05 90.8,42.8 J10.3
MZ_DIV1: J6.5 J9.3 R49.1 | length 9.6
  Top Layer w0.3: R49.1@82.2,53.7 83.75,55.25 85.89,55.25 J9.3 89.178,53.94 J6.5
MZ_DIV2: J6.6 J9.2 R46.1 | length 9.4
  Top Layer w0.3: R46.1@82.2,51.7 82.7,51.7 83.7,52.7 85.9,52.7 J9.2 89.178,51.4 J6.6
MZ_DIV3: J6.7 J9.1 R43.1 | length 9.1
  Top Layer w0.3: R43.1@82.2,49.7 82.65,50.15 85.91,50.15 J9.1 89.178,48.86 J6.7
MZ_STEP: J10.4 R6.1 | length 14.9
  Top Layer w0.3: R6.1 76.195,44.995 76.7,45.5 88.6,45.5 89.5,44.6 J10.4
MZZ_DIR: J6.1 J10.2 P22.1 | length 35.1
  Top Layer w0.3: J10.2 86.96,40.8 88.26,39.5 91.05,39.5 92.05,40.5 92.05,63.26 J6.1
  Bottom Layer w0.3: P22.1 90.169,65.14 J6.1
MZZ_STEP: J6.2 J10.5 P22.3 | length 33.9
  Top Layer w0.3: J10.5 88.25,42.75 88.25,40.6 88.75,40.1 90.5,40.1 91.45,41.05 91.45,61.319 J6.2
  Bottom Layer w0.3: P22.3 89.716,62.576 J6.2
NetC2_1: C2.1 U2.4 | length 5.3
  Top Layer w0.6: C2.1 28.25,35.2 28.7,35.65 28.7,37.15 29.15,37.6 U2.4
NetC6_1: C6.1 R3.1 R4.2 U2.2 | length 6.8
  Top Layer w1: C6.1 27.375,40.875 R4.2 ; 27.9,41 U2.2
NetD1_1: D1.1 D2.1 K1.1 | length 15
  Top Layer w2: D1.1 6.2,35.05 8.7,37.55 9.596,38.446 K1.1 10.971,38.571 11.85,39.45 13.05,40.65 14.2,41.8 14.2,43.092 ; 14.146,43.146 14.2,43.092 ; D2.1@14.2,44.4 14.2,43.092
NetD3_1: D3.1 R1.2 | length 2.5
  Top Layer w0.3: R1.2 26.8,19.067 D3.1@27.883,17.984
NetD4_2: D4.2 L1.1 U2.3 | length 21
  Top Layer w1.6: D4.2@24.435,48.4 26.035,46.8 35.4,46.8 39.9,42.3 U2.3@39.9,39.3
  other v1: 33.114,36.8 33.9,36.782 46.214,37.1 47.014,37.1 47.814,37.1 48.614,37.1 49.364,37.1 50.164,37.1 50.964,37.1 51.764,37.1 33.9,37.582 33.114,37.6 46.214,37.9 47.014,37.9 47.814,37.9 48.614,37.9 49.364,37.9 50.164,37.9 50.964,37.9 51.764,37.9 52.45,37.932 33.114,38.4 33.9,38.382 46.214,38.7 47.014,38.7 47.814,38.7 48.614,38.7 49.364,38.7 50.164,38.7 50.964,38.7 51.764,38.7 52.45,38.732 53.25,38.732 33.9,39.182 33.114,39.2 46.214,39.5 47.014,39.5 47.814,39.5 48.614,39.5 49.364,39.5 50.164,39.5 50.964,39.5 51.764,39.5 52.45,39.532 53.25,39.532 33.114,40 33.9,39.982 46.214,40.3 47.014,40.3 47.814,40.3 48.614,40.3 49.364,40.3 50.164,40.3 50.964,40.3 51.764,40.3 52.45,40.332 53.25,40.332 33.9,40.782 33.114,40.8 46.214,41.1 47.014,41.1 47.814,41.1 48.614,41.1 49.364,41.1 50.164,41.1 50.964,41.1 51.764,41.1 52.45,41.132 53.25,41.132 33.114,41.6 33.9,41.582 46.214,41.9 47.014,41.9 47.814,41.9 48.614,41.9 49.364,41.9 50.164,41.9 50.964,41.9 51.764,41.9 52.45,41.932 53.25,41.932 33.9,42.382 33.114,42.4
NetD5_1: D5.1 R2.2 | length 2
  Top Layer w0.3: D5.1 1.85,32.667 R2.2
NetD6_1: D6.1 R7.2 | length 1.9
  Top Layer w0.3: R7.2 7.884,72.784 D6.1
NetD6_2: D6.2 DZ2.1 P3.2 Q1.2 | length 25.5
  Top Layer w0.3: D6.2@9.683,70.984 11.166,70.984 v2(11.25,70.9)
  Top Layer w1: 16.876,65.6 16.892,65.584
  Top Layer w2: DZ2.1 9.035,54.635 Q1.2 16.876,62.476 16.876,65.6 P3.2
  Bottom Layer w0.3: v2(11.25,70.9) 14.191,70.9 P3.2
NetD8_2: D8.2 R30.2 | length 2
  Top Layer w0.3: D8.2@29.8,16.3 R30.2@31.8,16.3
NetD20_2: D20.2 R80.2 | length 1.9
  Top Layer w0.254: R80.2 12.616,17.416 D20.2
NetDZ4_2: DZ4.2 Q1.1 Q2.1 R26.2 R31.1 | length 45.3
  Top Layer w0.3: DZ4.2@27.9,49.6 28.95,48.55 34.1,48.55 R26.2 ; R26.2@34,48.45 R26.2 ; R31.1 R26.2
  Top Layer w1: Q2.1 20.54,59.94 18.39,57.79 18.39,56.59 17.3,55.5 14.3,55.5 Q1.1 13.4,53.2 15.35,51.25 26.75,51.25 27.9,50.1 DZ4.2@27.9,50.4
NetJ2_3: J2.3 J2.4 | length 2.5
  Top Layer w0.3: J2.4 J2.3
NetJ4_3: J4.3 J4.4 | length 2.5
  Top Layer w0.3: J4.4 J4.3
NetJ6_3: J6.3 J6.4 | length 2.5
  Top Layer w0.3: J6.4 J6.3
NetK1_2: K1.2 P1.1 | length 20.3
  Bottom Layer w2: P1.1 6.95,57.424 6.95,44.7 8.504,43.146 K1.2
NetP9_1: P9.1 Q3.2 | length 10.9
  Top Layer w2: Q3.2@89.85,27.3 88.6,27.3 90.602,29.302 P9.1
NetQ3_1: Q3.1 R33.2 | length 2.6
  Top Layer w0.3: Q3.1 86.3,21 R33.2 ; Q3.1@86.3,20.6 Q3.1@86.3,20.8
NetR5_1: R5.1 U4.18 | length 7.6
  Top Layer w0.3: R5.1 65.773,41.322 68.228,41.322 69.15,40.4 U4.18
NetR6_2: R6.2 U4.12 | length 6.9
  Top Layer w0.3: U4.12 73.2,39.8 76.195,42.795 R6.2
NetR9_2: R9.2 U4.13 | length 5.2
  Top Layer w0.3: U4.13 71.65,39.7 74.195,42.245 R9.2
NetR10_1: R10.1 U4.39 | length 4.3
  Top Layer w0.3: R10.1 67.15,26.525 U4.39
NetR12_2: R12.2 U4.14 | length 4.5
  Top Layer w0.3: U4.14 71.15,39.9 72.195,40.945 R12.2
NetR13_1: R13.1 U4.40 | length 4.5
  Top Layer w0.3: U4.40 67.65,27.025 R13.1
NetR14_2: R14.2 U4.15 | length 4.3
  Top Layer w0.3: R14.2 70.195,42.155 70.65,41.7 U4.15
NetR15_1: R15.1 U4.41 | length 5.6
  Top Layer w0.3: U4.41 68.15,27.65 68.6,27.2 69.375,27.2 R15.1
NetR16_2: R16.2 U4.16 | length 4.9
  Top Layer w0.3: R16.2 68.195,42.755 70.15,40.8 U4.16
NetR17_1: R17.1 U4.42 | length 6.7
  Top Layer w0.3: U4.42 68.65,28.05 69,27.7 70.775,27.7 R17.1
NetR18_2: R18.2 U4.17 | length 6.2
  Top Layer w0.3: R18.2 67.295,41.8 68.474,41.8 69.65,40.624 U4.17
NetR20_2: R20.2 U4.29 | length 13.3
  Top Layer w0.3: U4.29 66.6,35.25 v2(67.05,34.8) ; v2(74.75,31.1) R20.2
  Bottom Layer w0.3: v2(67.05,34.8) 69,34.8 72.7,31.1 v2(74.75,31.1)
NetR21_2: R21.2 U4.30 | length 3.4
  Top Layer w0.3: R21.2 61.85,34.75 U4.30
NetR23_2: R23.2 U4.31 | length 4.3
  Top Layer w0.3: R23.2 61.9,32.4 62.8,33.3 62.8,33.8 63.25,34.25 U4.31
NetR25_1: R25.1 U4.25 | length 5.1
  Top Layer w0.3: R25.1@61.157,40.013 62.687,40.013 64.6,38.1 U4.25
NetR27_1: R27.1 U4.26 | length 4
  Top Layer w0.3: R27.1@61.157,38.113 62.187,38.113 63.35,36.95 63.528,36.772 63.55,36.75 U4.26
NetR29_1: R29.1 U4.27 | length 3.5
  Top Layer w0.3: R29.1@61.157,36.213 61.195,36.25 U4.27
NetR30_1: R30.1 U4.38 | length 42.7
  Top Layer w0.3: R30.1@31.8,17.9 v2(33.2,17.9) ; v2(60.5,24.8) 63.25,24.8 66.65,28.2 U4.38
  Bottom Layer w0.3: v2(33.2,17.9) 34.1,18.8 35.6,18.8 55.75,18.8 58.25,21.3 58.25,24.05 59,24.8 v2(60.5,24.8)
NRST: C15.2 R28.2 U4.7 | length 7
  Top Layer w0.254: U4.7 74.45,34.75 75.1,35.4 75.1,37.2 75.275,37.375 C15.2 R28.2
PROBE: C33.2 P15.16 R15.2 R38.1 | length 19
  Top Layer w0.3: R15.2 70.5,24.05 v2(71.05,23.5) ; C33.2 75.949,20.151 R38.1 v1(76,18.75) 76,15.987 P15.16
  Bottom Layer w0.3: v2(71.05,23.5) 71.05,19.25 71.05,18.85 71.8,18.1 75.35,18.1 v1(76,18.75)
RESET: C32.2 K2.1 P8.5 P15.14 R11.1 R17.2 R37.1 | length 68.4
  Top Layer w0.3: R11.1@31.9,20.1 31.907,20.107 34.139,20.107 34.139,13.8 ; K2.1@34.139,11.7 34.139,13.8 ; P8.5 47.975,11.95 43.4,11.95 41.488,13.862 34.201,13.862 34.139,13.8 ; C32.2 70.325,20.1 R37.1 v1(72.2,18.8) 72.2,17.247 P15.14 ; v2(72.4,23.4) R17.2
  Bottom Layer w0.3: P8.5 51.375,15.35 56.95,15.35 58.65,13.65 73.348,13.65 P15.14 ; v1(72.2,18.8) 72.2,23 72.4,23.2 v2(72.4,23.4)
RUN: C34.2 P15.18 R13.2 R39.1 | length 24.4
  Top Layer w0.3: v2(68.6,23.45) R13.2 ; C34.2 79.775,20.125 R39.1 v1(79.8,18.7) 79.8,15.022 P15.18
  Bottom Layer w0.3: v2(68.6,23.45) 68.6,19.95 70.95,17.6 78.7,17.6 v1(79.8,18.7)
RXD: P8.8 P12.3 R23.1 | length 74.4
  Top Layer w0.3: P12.3@18.21,12.45 18.075,12.45 17.25,13.275 15,13.275 14.39,12.664 14.39,11.1 16.118,9.372 50.722,9.372 54,12.65 54,15.178 P8.8 ; R23.1 58.7,31.3 58.7,30.3 58.7,25.5 60.3,23.9 v2(60.5,23.9)
  Bottom Layer w0.3: P8.8 55.727,16.577 59.55,20.4 59.55,23.1 v2@60.35,23.9
SPINDLE_PWM: P6.3 P10.3 P13.3 P14.2 R26.1 R33.1 U5.4 | length 214
  Top Layer w0.3: v2(25.75,14.7) 30.75,14.7 31.6,13.85 P6.3 P6.3@31.6,12 ; R26.1 36.9,48.8 40.1,45.6 43.8,45.6 ; 43.4,45.6 43.8,45.6 ; v2(55.1,31.25) 55.1,44.85 54.35,45.6 43.8,45.6 ; U5.4 79.65,26.1 81.9,23.85 83.65,23.85 84.5,23 84.9,22.6 R33.1 95.8,22.6 P10.3 99.15,25.95 99.15,42.1 ; P14.2 98.356,51.244 99.15,50.45 99.15,42.1 ; P13.3 98.351,42.899 99.15,42.1
  Bottom Layer w0.3: v2(25.75,14.7) 25.75,15.9 20.5,21.15 20.5,26.8 22.35,28.65 52.5,28.65 v2(55.1,31.25) ; P6.3 32.7,11.1 86.7,11.1 88.45,12.85 88.45,21.4 v2(89.65,22.6)
SPN+: DZ3.2 P2.2 | length 13.3
  Top Layer w2: DZ3.2 27.199,62.535 P2.2
SPN-: DZ3.1 P2.3 Q2.2 | length 27.2
  Top Layer w2: DZ3.1@21.5,55.995 DZ3.1 23.035,57.2 36.7,57.2 36.8,57.1 37.599,57.899 37.599,63.8 ; 37.599,64.1 P2.3
SWCLK: P5.3 U4.37 | length 42.8
  Top Layer w0.3: v2(65.1,30.2) U4.37
  Bottom Layer w0.3: v2(65.1,30.2) 64.35,29.45 64.35,28.25 66.05,26.55 75.4,26.55 76.9,25.05 90.65,25.05 92.15,23.55 92.15,17.19 P5.3
SWDIO: P5.4 U4.34 | length 42.4
  Top Layer w0.3: U4.34 67,32.75 67.85,33.6 v2(67.85,34)
  Bottom Layer w0.3: v2(67.85,34) 68.85,34 77.3,25.55 91,25.55 92.84,23.71 92.84,15.34 P5.4
TXD: P8.6 P12.4 R21.1 | length 68.7
  Top Layer w0.3: P12.4 15.67,10.935 16.252,10.352 16.755,9.85 48.15,9.85 51.4,13.1 51.4,15.238 P8.6 ; v2(59.3,23.9) 58.2,25 58.2,31.1 58.2,33.55 58.95,34.3 R21.1
  Bottom Layer w0.3: P8.6 51.485,18 55.9,18 58.9,21 58.9,23.5 v2(59.3,23.9)
USB-CHK: R50.2 R59.1 U4.19 | length 83.3
  Top Layer w0.3: R50.2 12.6,14.4 ; 12.6,14.6 12.6,14.4 ; v2(24.35,14.7) 13.4,14.7 R59.1 12.6,14.4 ; v2(68.65,36.4) U4.19
  Bottom Layer w0.3: v2(24.35,14.7) 24.35,16.5 20,20.85 20,27.1 22.028,29.128 51.878,29.128 54.25,31.5 54.4,31.65 59.15,36.4 v2(68.65,36.4)
USB_DM: P4.A7 P4.B7 U4.32 | length 84.1
  Top Layer w0.254: P4.A7 6.258,22.092 6,22.35 6,22.8 6.292,23.092 P4.B7 13.458,23.092 14.2,22.35 14.2,16.25 14.718,15.732 25.182,15.732 25.55,16.1 v2(25.55,18.05) ; v2(59.6,26.5) 62.8,26.5 v2(65.1,28.8) ; U4.32 65.7,33.75 v2(66.2,34.25)
  Bottom Layer w0.254: v2(25.55,18.05) 25.55,18.45 26.85,19.75 54.85,19.75 57.1,22 57.1,24.6 59,26.5 v2(59.6,26.5) ; v2(65.1,28.8) 66.2,29.9 v2(66.2,34.25)
USB_DP: P4.A6 P4.B6 R32.2 U4.33 | length 84.9
  Top Layer w0.254: P4.B6 9.442,21.592 9.75,21.9 9.75,22.592 ; P4.A6 9.75,22.592 ; R32.2 13.7,21.2 13.75,21.25 ; v2(26.4,18.05) 26.4,16.3 25.4,15.3 14.45,15.3 13.75,16 13.75,21.25 ; v2(60.15,25.75) 63.25,25.75 v2(65.7,28.2) ; U4.33 66.5,33.25 v2(66.9,33.65) ; 9.75,22.592 12.908,22.592 13.75,21.75 13.75,21.25
  Bottom Layer w0.254: v2(26.4,18.05) 27.65,19.3 55.3,19.3 57.7,21.7 57.7,24.4 59.05,25.75 v2(60.15,25.75) ; v2(65.7,28.2) 66.9,29.4 v2(66.9,33.65)
VCC: C8.1 C9.2 C18.2 D9.2 J1.2 J3.2 J5.2 J7.4 J7.5 J7.6 J8.4 J8.5 J8.6 J9.4 J9.5 J9.6 P6.2 P8.1 P8.2 P12.1 P17.2 P17.4 P20.2 P20.4 P22.2 P22.4 pad.3 U1.3 U3.3 U5.5 | length 270
  Top Layer w0.3: J1.2 49.305,67.408 v2(50.25,67.408) ; J7.6 53.02,47.4 55.17,47.4 ; v2(56.8,12.972) 56.8,13.7 ; v2(57.75,48.6) 56.37,48.6 55.17,47.4 ; J8.6 69.38,47.6 71.72,47.6 72.72,48.6 v2(74.35,48.6) ; v2(80.85,13.7) 56.8,13.7 ; U5.5 81.55,25.35 81.975,24.925 C18.2 84.025,24.925 v2(84.65,24.3) ; 55.17,47.4 55.922,46.648 55.922,15.652 56.8,14.774 56.8,13.7
  Top Layer w1: D9.2 13.625,27.175 21.225,27.175 C8.1@24,24.4 ; C9.2 23.95,23.3 C8.1@24,23.35 ; U3.3@23.7,21.4 24,21.7 C8.1@24,23.35 ; U1.3@29.4,24.06 26.2,24.06 24.34,24.06 C8.1@24,24.4 ; C8.1@24,23.35 C8.1@24,24.4
  Bottom Layer w0.3: v2(50.25,67.408) 50.25,66.45 P17.2 ; J7.6 J7.5 J7.4 51.66,54.88 P17.4 52.93,58.69 52.93,61.23 P17.2 ; v2(57.75,48.6) 67.74,48.6 J8.6 J8.5 J8.4 68.06,54.98 P20.4 69.33,58.79 69.33,61.33 P20.2 71.885,63.885 76.073,63.885 J5.2@77.307,62.651 ; J3.2 59.673,63.785 55.485,63.785 P17.2 ; v2(74.35,48.6) 84.4,48.6 J9.6 J9.5 J9.4 84.66,54.98 P22.4 85.93,58.79 85.93,61.33 P22.2 ; v2(80.85,13.7) 80.85,15.45 83.75,18.35 83.75,23.4 v2(84.65,24.3)
  Bottom Layer w0.6: 23.29,13.65 23.34,13.7 29.1,13.7 ; P6.2@29.06,12 P6.2 29.06,13.66 29.1,13.7 ; P8.2 P8.1 ; v2(56.8,12.972) 56.228,12.4 46.618,12.4 P8.1 ; 29.1,13.7 44.645,13.7 P8.1
  Bottom Layer w1: pad.3 19.05,20.5 23.29,16.26 23.29,13.65 P12.1
VSPN: C26.1 C27.1 C28.1 C40.1 D2.2 DZ2.2 J1.8 J3.8 J5.8 P3.1 P10.1 P27.1 pad.0@13.65,46.9 pad.1@14.6,46.9 R7.1 | length 340
  Top Layer w0.3: R7.1 7.8,70.3 8.5,69.6 11.478,69.6 P3.1
  Top Layer w1: P3.1 16.598,71.95 21.35,71.95 ; P27.1 21.35,69.52 21.35,71.95 ; J1.8 46.05,48.912 46.05,61.25 C26.1 53.7,68.9 ; J3.8 62.5,48.903 62.5,61.3 C27.1 63.75,66.65 59.25,66.65 57,68.9 53.7,68.9 ; J5.8 79.15,48.992 79.15,59.85 82.4,63.1 C28.1 80.972,66.028 80.972,71.685 79.707,72.95 53.7,72.95 ; 21.35,71.95 26.3,71.95 27.3,72.95 53.7,72.95 ; 53.7,68.9 53.7,72.95
  Top Layer w2: P3.1 12.863,66.863 11.5,65.5 7.3,65.5 5.8,64 5.8,57.8 2.3,54.3 DZ2.2 5.965,50.5 12.8,50.5 D2.2@14.2,49.1 ; 14.2,47.1 D2.2@14.2,48.6 ; 90,17.2 93.15,17.2 94.91,18.96 P10.1
  Bottom Layer w2: 90.2,9.5 94.5,13.8 94.5,16.06 P10.1
  Bottom Layer w2.5: 14.15,46.9 14.15,36.8 13.607,36.257 13.607,10.993 15.1,9.5 90.2,9.5
VUSB: C17.2 D9.1 D20.1 P4.A4 P4.A9 P4.B4 P4.B9 R32.1 R50.1 | length 28.2
  Top Layer w0.3: P4.B9@7.05,24.692 6.592,24.692 ; P4.B4@7.628,19.967 6.617,19.967 5.3,21.284 5.3,23.4 6.592,24.692 ; P4.A9 10.508,19.792 ; C17.2 9.4,24.742 9.35,24.692 ; D20.1 10.283,19.283 9.1,18.1 9.1,14.45 9.95,13.6 R50.1 ; R32.1 11,19.3 D20.1@11.1,19.2 ; D9.1 11.908,24.692 9.35,24.692 ; 6.592,24.692 P4.B9 9.35,24.692
X_LIMT: C29.2 P15.2 P15.4 R25.2 R34.1 | length 38.7
  Top Layer w0.3: R25.2@59.557,40.013 59.263,40.013 56.45,37.2 56.45,16 57.575,14.875 P15.2 ; R34.1 60.775,20.125 C29.2 59.333,19.693 v2(59.333,18.55) P15.2 ; P15.4 P15.2
XTAL1: C19.1 U4.5 Y1.1 | length 10.9
  Top Layer w0.3: U4.5 79.55,33.75 Y1.1 81.275,32.025 C19.1
XTAL2: C16.1 U4.6 Y1.2 | length 17.9
  Top Layer w0.3: U4.6 77.35,34.25 79.9,36.8 79.9,38.2 ; Y1.2 79.9,38.2 ; C16.1 79.951,38.149 79.9,38.2
Y_LIMT: C30.2 P15.6 P15.8 R27.2 R35.1 | length 40.9
  Top Layer w0.3: v2(57.6,16.1) 57.547,16.1 57,16.647 57,36 59.113,38.113 R27.2@59.557,38.113 ; C30.2 64.575,20.125 R35.1 64.413,19.913 P15.6 P15.8
  Bottom Layer w0.3: v2(57.6,16.1) 57.547,16.1 57.502,16.145 63.143,16.145 P15.6
Z_LIMT: C31.2 P15.10 P15.12 R29.2 R36.1 | length 43.2
  Top Layer w0.3: v2(58.1,16.95) 57.6,17.45 57.6,35.2 58.613,36.213 R29.2@59.557,36.213 ; C31.2 68.349,20.151 R36.1 68.4,15.967 P15.10 P15.12
  Bottom Layer w0.3: v2(58.1,16.95) 67.417,16.95 P15.10
pads on no net: K1.3 K1.4 K1.5 K2.0 P4. P4.A5 P4.A8 P4.B5 P4.B8 P8.7 U4.1 U4.2 U4.3 U4.4 U4.21 U4.22 U4.43 U4.45 U4.46 U5.1

## Polygon pours and split planes (outlines as drawn)
NetD4_2 on Top Layer "Keep-Out Layer-No Net" (hatched 90Degree grid 0.05 track 0.1, remove dead copper, pour order 1000): 34.4,33.9 29.5,38.8 29.5,39.15 35.95,45.6 42.8,45.6 54.622,45.6 55.922,44.3 55.922,33.722 54.8,32.6 35.7,32.6 34.4,33.9
GND on Top Layer "Keep-Out Layer-No Net" (hatched 90Degree grid 0.05 track 0.1, remove dead copper, pour order 0): -4.571,75.618 100.829,75.618 107.579,68.868 107.579,18.018 100.229,10.668 99.829,10.268 93.629,10.268 -1.521,10.268 -9.371,18.118 -9.371,70.818 -4.571,75.618
GND on Bottom Layer "Keep-Out Layer-No Net" (hatched 90Degree grid 0.05 track 0.1, remove dead copper, pour order 1004): -4.222,75.738 101.178,75.738 107.928,68.988 107.928,18.138 100.578,10.788 100.178,10.388 93.978,10.388 -1.172,10.388 -9.022,18.238 -9.022,70.938 -4.222,75.738
NetD4_2 on Bottom Layer "Keep-Out Layer-No Net" (hatched 90Degree grid 0.05 track 0.1, remove dead copper, pour order 1002): 34.8,31.9 32,31.9 28.7,35.2 28.7,42.95 30.8,45.05 31.85,46.1 49.4,46.1 53.85,46.1 55.15,44.8 55.15,37.6 54.4,36.85 49.45,31.9 34.8,31.9

## Keep-outs
Keep-Out Layer:
  circle w0.127: c97.5,13.3 r1.55
  circle w0.127: c2.5,72.7 r1.55
  circle w0.127: c97.5,72.7 r1.55
  circle w0.127: c2.5,13.3 r1.55
  circle w0.127: c94,5 r2.5
  circle w0.127: c5,81 r2.5
  circle w0.127: c95,81 r2.5
  circle w0.127: c5,5 r2.5
  lines w0.127: 0,5.5 ccw(c5.5,5.5) 5.5,0 94.5,0 ccw(c94.5,5.5) 100,5.5 100,80.5 ccw(c94.5,80.5) 94.5,86 5.5,86 ccw(c5.5,80.5) 0,80.5 0,5.5

## Silkscreen, mask and mechanical layers (free items; w line width, h text height)
Top Overlay:
  lines w0.2: 11.06,71.542 11.06,73.8 18.858,73.8 18.858,71.517 ; 19.05,71.9 19.05,73.8 24.85,73.8 24.85,71.9 ; 25.135,71.999 25.135,73.8 39.999,73.8 39.999,71.999 ; 30.1,71.999 30.1,73.8 ; 35.15,71.999 35.15,73.8 ; 40.075,19.707 40.075,21.3 57.797,21.3 57.797,19.707 ; 58.132,16.145 58.132,18.45 83.333,18.45 83.333,16.145 ; 60.75,16.145 60.75,18.45 ; 63.29,16.145 63.29,18.45 ; 65.83,16.145 65.83,18.45 ; 68.37,16.145 68.37,18.45 ; 70.91,16.145 70.91,18.45 ; 73.45,16.145 73.45,18.45 ; 75.99,16.145 75.99,18.45 ; 78.53,16.145 78.53,18.45 ; 81.07,16.145 81.07,18.45 ; 82.62,40.13 82.62,38.9 91.42,38.9 91.42,40.13 ; 93.819,46.074 92.05,46.074 92.05,53.674 93.819,53.674 ; 93.832,54.05 92.05,54.05 92.05,61.65 93.832,61.65 ; 93.844,26.872 92,26.872 92,34.472 93.844,34.472 ; 93.844,35.259 92.05,35.259 92.05,45.259 93.844,45.259 ; 93.85,16.56 92.056,16.56 92.056,26.56 93.85,26.56 ; 93.857,62.229 92.1,62.229 92.1,69.829 93.857,69.829
  text "X-Axis" at 44.25,73.55 h1.02
  text "Y1-Axis" at 57.3,73.55 h1.02
  text "Y2-Axis" at 70.5,73.55 h1.02
  text "Z-Axis" at 84.45,73.55 h1.02
  text "24V" at 20.7,72.9 h0.7
  text "48V-" at 26.15,72.65 h0.91
  text "48V+" at 31.103,72.65 h0.91
  text "SPN-" at 36.208,72.65 h0.91
  text "+Spindle-" at 12,72.15 h0.86
  text "GND" at 20.7,72.05 h0.7
  text "DC:7-36V" at 3.75,69.3 h0.7
  text "-12V+" at 93.43,62.525 h1 r90
  text "12V" at 93.404,58.461 h1 r90
  text "GND" at 93.37,54.423 h1 r90
  text "PWM" at 93.404,50.613 h1 r90
  text "GND" at 93.429,46.625 h1 r90
  text "S-DivY" at 67.75,46.25 h0.7
  text "S-DivZ" at 84.1,46.15 h0.7
  text "S-DivX" at 51.2,45.95 h0.7
  text "E-Z" at 80.3,45.8 h1
  text "E-Y" at 64.5,45.55 h1
  text "OFF" at 7.55,45.25 h1.2
  text "E-X" at 48.55,44.85 h1
  text "PWM" at 93.453,42.281 h1 r90
  text "ON" at 7.682,39.208 h1.2
  text "XYY(--)XYZ" at 83.8,39.2 h0.7
  text "GND" at 93.403,38.878 h1 r90
  text "12V" at 93.403,35.5 h1 r90
  text "PWR" at 0.9,31.9 h0.7 r90
  text "12V" at 93.355,31.385 h1 r90
  text "-LR" at 93.33,27.219 h1 r90
  text "PWM" at 93.458,23.583 h1 r90
  text "GND" at 93.408,20.179 h1 r90
  text "OffLineContollerPlug" at 40.4,20.05 h0.91
  text "RESET" at 34.75,18.9 h0.7
  text "X+" at 58.634,16.958 h1.07
  text "X-" at 61.174,16.958 h1.07
  text "Rst" at 73.772,16.958 h0.8
  text "A2" at 78.9,16.95 h1.07
  text "A1" at 81.494,16.932 h1.07
  text "Y+" at 63.689,16.907 h1.07
  text "A5" at 76.287,16.907 h1.07
  text "Z-" at 71.258,16.881 h1.07
  text "Z+" at 68.743,16.856 h1.07
  text "Y-" at 66.229,16.831 h1.07
  text "24V" at 93.408,16.801 h1 r90
  text "RUN" at 26.5,14.7 h0.7
  text "3V3" at 28.85,14.7 h0.7
  text "TX" at 15.15,13.8 h0.7
  text "RX" at 17.55,13.8 h0.7
  text "GND" at 19.85,13.8 h0.7
  text "5V" at 22.8,13.8 h0.7
  text "PWM" at 30.7,13.7 h0.7
  text "GND" at 25.55,13.65 h0.7
  text "5V" at 28.4,13.65 h0.7
  text "<GND" at 83.7,12.25 h0.7
  text "AUX-1" at 46.925,11.979 h0.7
  text "LY-GRBL3-10086-V11" at 83.8,11.1 h0.7
Bottom Overlay:
  drawing of 166 lines, arcs and shapes, not listed
  text "SPINDLE" at 18.11,74.971 h1
  text "SPINDLE" at 35.967,74.92 h1
  text "X-AXIS" at 49.947,74.92 h1
  text "Y1-AXIS" at 63.308,74.92 h1
  text "Y2-AXIS" at 76.592,74.92 h1
  text "Z-AXIS" at 90.003,74.92 h1
  text "A+" at 48.944,73.155 h1
  text "A+" at 62.304,73.155 h1
  text "A+" at 72.909,73.168 h1
  text "A+" at 89,73.155 h1
  text "-48V" at 29.322,73.142 h1
  text "A-" at 70.47,73.142 h1
  text "+48V" at 34.453,73.117 h1
  text "SP-" at 38.924,73.117 h1
  text "A-" at 51.395,73.117 h1
  text "A-" at 64.755,73.117 h1
  text "A-" at 91.451,73.117 h1
  text "B+" at 43.534,73.079 h1
  text "B-" at 46.264,73.092 h1
  text "B+" at 56.894,73.079 h1
  text "B-" at 59.625,73.092 h1
  text "B-" at 75.423,73.092 h1
  text "B+" at 78.04,73.092 h1
  text "B+" at 83.59,73.079 h1
  text "B-" at 86.32,73.092 h1
  text "SP+" at 14.032,73.066 h1
  text "SP-" at 18.35,73.066 h1
  text "+24V-" at 24.35,70.35 h1 r90
  text "12V" at 95.286,69.155 h1 r90
  text "FAN" at 93.508,67.173 h1 r90
  text "GND" at 95.286,65.294 h1 r90
  text "Z" at 75.728,61.763 h0.8
  text "X" at 42.378,61.738 h0.8
  text "Y" at 59.167,61.738 h0.8
  text "12V" at 95.261,60.976 h1 r90
  text "A-" at 76.49,59.68 h0.8
  text "B+" at 59.904,59.63 h0.8
  text "B+" at 43.419,59.604 h0.8
  text "DC12V/TTL" at 93.457,58.588 h1 r90
  text "GND" at 95.261,57.115 h1 r90
  text "A+" at 76.516,57.09 h0.8
  text "B-" at 59.904,57.064 h0.8
  text "B-" at 43.419,57.039 h0.8
  text "DC:7-36V" at 9.409,56.582 h1
  text "A+" at 59.879,54.55 h0.8
  text "A+" at 43.394,54.524 h0.8
  text "B-" at 76.49,54.524 h0.8
  text "PWM" at 95.248,53 h1 r90
  text "A-" at 59.879,52.035 h0.8
  text "A-" at 43.394,52.01 h0.8
  text "B+" at 76.49,52.01 h0.8
  text "GND" at 95.248,49.139 h1 r90
  text "PWM" at 95.312,44.948 h1 r90
  text "OFF" at 0.481,43.628 h0.91 r270
  text "LSR/TTL" at 93.407,43.145 h1 r90
  text "GND" at 95.286,41.519 h1 r90
  text "ON" at 0.455,40.808 h0.91 r270
  text "12V" at 95.299,38.141 h1 r90
  text "12V" at 95.274,33.798 h1 r90
  text "LASER" at 93.457,32.68 h1 r90
  text "-LR" at 95.274,29.937 h1 r90
  text "PWM" at 95.317,26.05 h1 r90
  text "LSR/TTL" at 93.412,24.446 h1 r90
  text "GND" at 95.292,22.721 h1 r90
  text "24V" at 95.3,19.5 h1 r90
  text "RXD" at 53.732,18.202 h0.7
  text "+5V" at 45.909,18.177 h0.7
  text "GND" at 48.499,18.177 h0.7
  text "TXD" at 51.166,18.177 h0.7
  text "Zend" at 72.782,16.602 h1
  text "A1" at 82.993,16.602 h1
  text "Xend" at 62.673,16.577 h1
  text "Yend" at 67.676,16.577 h1
  text "RT" at 75.398,16.577 h1
  text "A5" at 78.04,16.577 h1
  text "A2" at 80.58,16.577 h1
  text "GND" at 21.829,13.529 h0.8
  text "+5V" at 24.776,13.503 h0.8
  text "HC05" at 18.375,13.478 h0.8
  text "+5V" at 45.934,11.674 h0.7
  text "RST" at 51.141,11.674 h0.7
  text "GND" at 48.601,11.649 h0.7
  text "NC" at 53.452,11.649 h0.7
Mechanical 15:
  circle w0.127: c2.5,72.7 r3
  circle w0.127: c2.5,13.3 r3
  circle w0.127: c97.5,13.3 r3
  circle w0.127: c97.5,72.7 r3

## Text inside footprints (layer, text, board x,y; h text height)
P1: Top Overlay "+" at 6.076,60.15 h2 r270